# Altium PCB PCB1.PcbDoc (part 3 of 8)
Units mil, origin at the board's own origin, x right, y up, seen from the top; angles counter-clockwise.
Board outline 6000 x 4000 mil, 2 copper layers (Top Layer, Bottom Layer); 1253 components, 565 nets, 6549 pads, 0 vias.
Unrouted connection lines stored in the file: 1925.
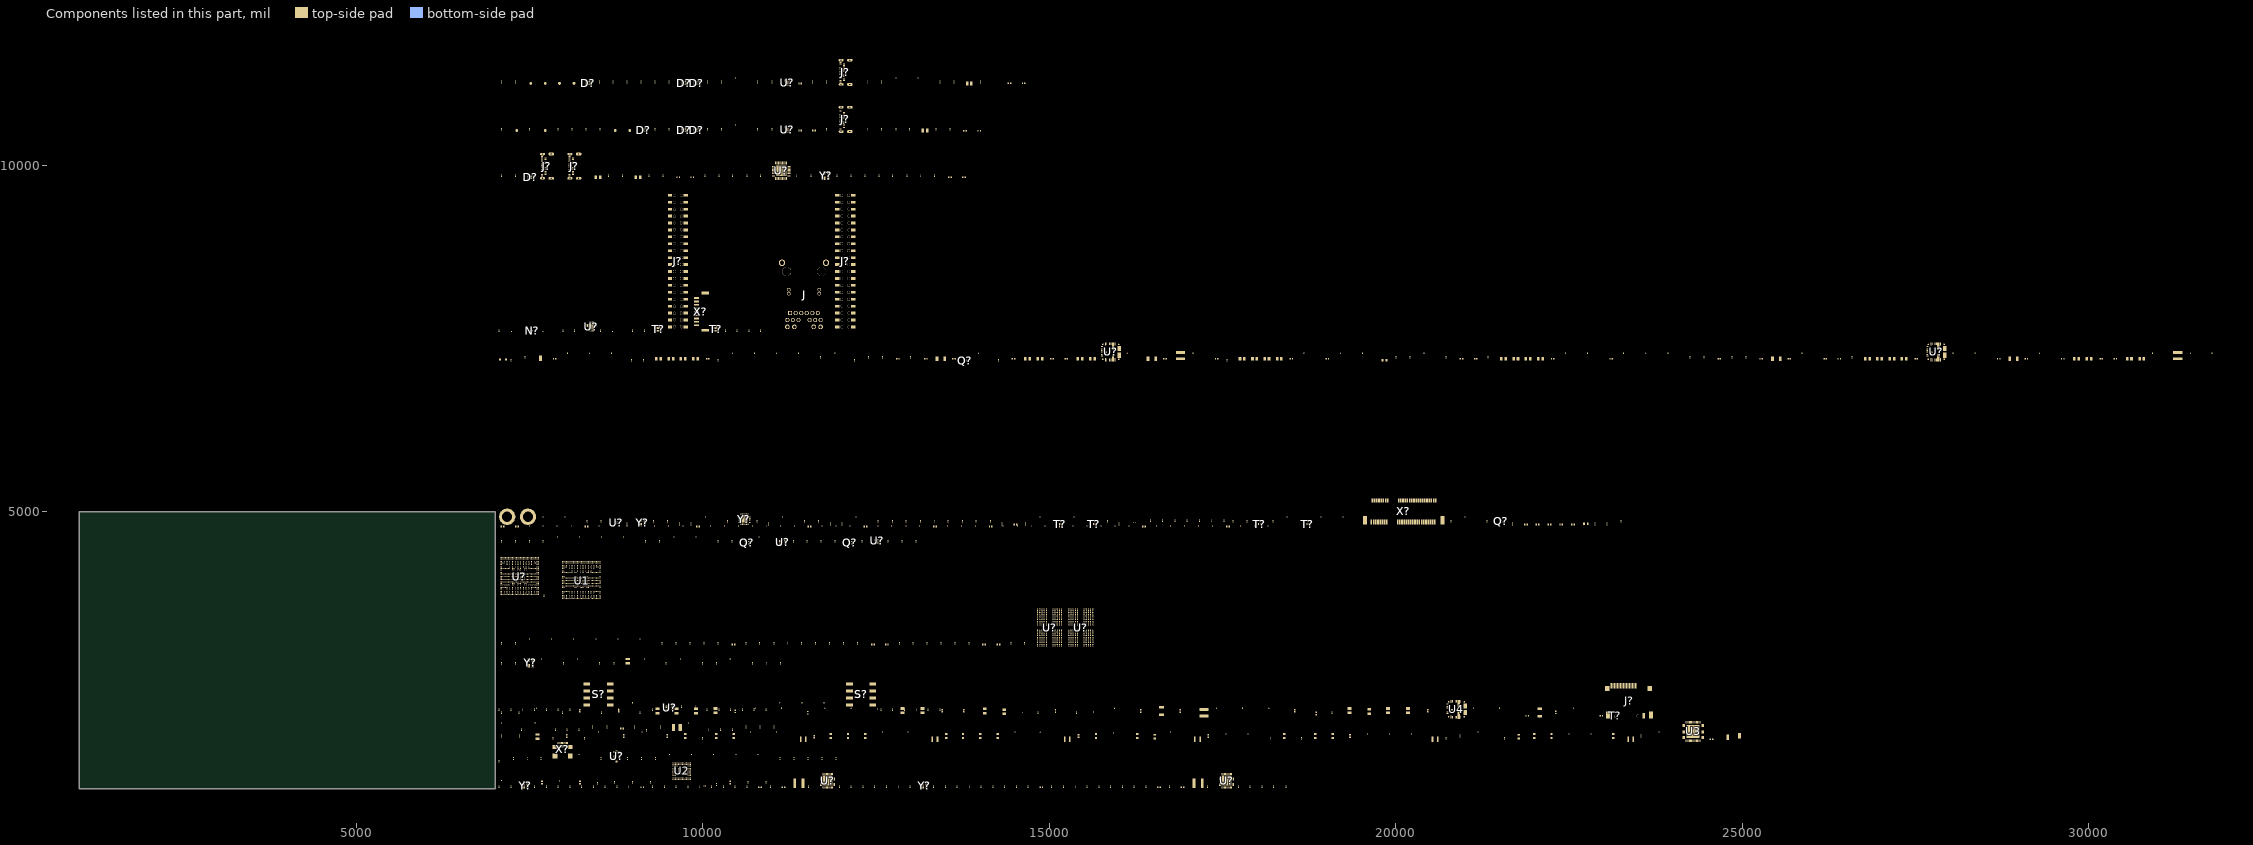
[diagram p3: the components of this part, seen from the top]

## Footprints (in the part's own frame and the unit in brackets; to place one, negate y for a bottom-side part, rotate by r counter-clockwise, add the part's x,y. Pads: shape width x height; smd on the part's side, far side on the other; paste and mask are expansions set on the pad)
3-PICOSTAR_TI [mm] "1.0 × 0.6 × 0.36 mm ,3-XFDFN, 3-PICOSTAR"
  rrect25% 0.35x0.25 smd paste-2539.97 mask-2539.97: 1(-0.35,0.225) 2(-0.35,-0.225)
  rrect25% 0.35x0.6 smd paste-2539.97 mask-2539.97: 3(0.35,0)
  silkscreen extent -0.53,-0.35 0.53,0.35, body extent -0.52,-0.32 0.52,0.32, height 0.34
693071020811 [mm]
  rect 0.7x1.9 smd: 1(2.25,11.05) 2(1.15,11.05) 3(0.05,11.05) 4(-1.05,11.05) 5(-2.15,11.05) 6(-3.25,11.05) 7(-4.35,11.05) 8(-5.45,11.05) 9(-6.55,11.05)
  rect 1.7x1.8 smd: 10(-8.1,10) 11(7.4,10)
  rect 1.4x2.6 smd: 12(-7.85,0.4) 13(7.85,0.4)
  round 0.9 hole 0.9 unplated: ""(-4.95,0)
  round 1 hole 1 unplated: ""(3.05,0)
  Keep-Out Layer board cut-out: 2.648,-0.497 2.7,-0.5 3.4,-0.5 3.452,-0.497 3.504,-0.489 3.555,-0.476 3.603,-0.457 3.65,-0.433 3.694,-0.405 3.735,-0.372 3.772,-0.335 3.805,-0.294 3.833,-0.25 3.857,-0.203 3.876,-0.155 3.889,-0.104 3.897,-0.052 3.9,0 3.897,0.052 3.889,0.104 3.876,0.155 3.857,0.203 3.833,0.25 3.805,0.294 3.772,0.335 3.735,0.372 3.694,0.405 3.65,0.433 3.603,0.457 3.555,0.476 3.504,0.489 3.452,0.497 3.4,0.5 2.7,0.5 2.648,0.497 2.596,0.489 2.545,0.476 2.497,0.457 2.45,0.433 2.406,0.405 2.365,0.372 2.328,0.335 2.295,0.294 2.267,0.25 2.243,0.203 2.224,0.155 2.211,0.104 2.203,0.052 2.2,0 2.203,-0.052 2.211,-0.104 2.224,-0.155 2.243,-0.203 2.267,-0.25 2.295,-0.294 2.328,-0.335 2.365,-0.372 2.406,-0.405 2.45,-0.433 2.497,-0.457 2.545,-0.476 2.596,-0.489
  silkscreen extent -7.45,-3.97 7.45,12
BEL_0826-1X1T-M1-F [mil]
  rect 60x60 hole 40: 1(-200,-600)
  round 60 hole 40: 2(-120,-600) 3(-40,-600) 4(40,-600) 5(120,-600) 6(200,-600) 7(-240,-700) 8(-160,-700) 9(-80,-700) 10(80,-700) 11(160,-700) 12(240,-700)
  round 52 hole 35: 13(-220,-320) 14(220,-320) 15(-220,-262) 16(220,-262)
  round 67.5 hole 45: 17(-240,-800) 18(-140,-800) 19(140,-800) 20(240,-800)
  round 93 hole 62: S1(-317.5,125) S2(317.5,125)
  round 128 hole 128 unplated: ""(-250,0) ""(250,0)
  Keep-Out Layer region: 351,158 236,158 236,310 -236,310 -236,158 -351,158 -351,430 351,430
  Keep-Out Layer region: 351,158 236,158 236,310 -236,310 -236,158 -351,158 -351,430 351,430
  Keep-Out Layer region: -236,-790 -351,-790 -351,-535 -236,-535
  Keep-Out Layer region: 351,-790 236,-790 236,-535 351,-535
  Keep-Out Layer region: -236,-790 -351,-790 -351,-535 -236,-535
  Keep-Out Layer region: 351,-790 236,-790 236,-535 351,-535
  silkscreen extent -346,-860 321,430
BGA200C65P12X22_1000X1450X114 [mm] "BGA200"
  round 0.4 smd paste+0 mask+0.05: A1(-4.4,6.825) A2(-3.6,6.825) A3(-2.8,6.825) A4(-2,6.825) A5(-1.2,6.825) A8(1.2,6.825) A9(2,6.825) A10(2.8,6.825) A11(3.6,6.825) A12(4.4,6.825) AA1(-4.4,-6.175) AA2(-3.6,-6.175) AA3(-2.8,-6.175) AA4(-2,-6.175) AA5(-1.2,-6.175) AA8(1.2,-6.175) AA9(2,-6.175) AA10(2.8,-6.175) AA11(3.6,-6.175) AA12(4.4,-6.175) AB1(-4.4,-6.825) AB2(-3.6,-6.825) AB3(-2.8,-6.825) AB4(-2,-6.825) AB5(-1.2,-6.825) AB8(1.2,-6.825) AB9(2,-6.825) AB10(2.8,-6.825) AB11(3.6,-6.825) AB12(4.4,-6.825) B1(-4.4,6.175) B2(-3.6,6.175) B3(-2.8,6.175) B4(-2,6.175) B5(-1.2,6.175) B8(1.2,6.175) B9(2,6.175) B10(2.8,6.175) B11(3.6,6.175) B12(4.4,6.175) C1(-4.4,5.525) C2(-3.6,5.525) C3(-2.8,5.525) C4(-2,5.525) C5(-1.2,5.525) C8(1.2,5.525) C9(2,5.525) C10(2.8,5.525) C11(3.6,5.525) C12(4.4,5.525) D1(-4.4,4.875) D2(-3.6,4.875) D3(-2.8,4.875) D4(-2,4.875) D5(-1.2,4.875) D8(1.2,4.875) D9(2,4.875) D10(2.8,4.875) D11(3.6,4.875) D12(4.4,4.875) E1(-4.4,4.225) E2(-3.6,4.225) E3(-2.8,4.225) E4(-2,4.225) E5(-1.2,4.225) E8(1.2,4.225) E9(2,4.225) E10(2.8,4.225) E11(3.6,4.225) E12(4.4,4.225) F1(-4.4,3.575) F2(-3.6,3.575) F3(-2.8,3.575) F4(-2,3.575) F5(-1.2,3.575) F8(1.2,3.575) F9(2,3.575) F10(2.8,3.575) F11(3.6,3.575) F12(4.4,3.575) G1(-4.4,2.925) G2(-3.6,2.925) G3(-2.8,2.925) G4(-2,2.925) G5(-1.2,2.925) G8(1.2,2.925) G9(2,2.925) G10(2.8,2.925) G11(3.6,2.925) G12(4.4,2.925) H1(-4.4,2.275) H2(-3.6,2.275) H3(-2.8,2.275) H4(-2,2.275) H5(-1.2,2.275) H8(1.2,2.275) H9(2,2.275) H10(2.8,2.275) H11(3.6,2.275) H12(4.4,2.275) J1(-4.4,1.625) J2(-3.6,1.625) J3(-2.8,1.625) J4(-2,1.625) J5(-1.2,1.625) J8(1.2,1.625) J9(2,1.625) J10(2.8,1.625) J11(3.6,1.625) J12(4.4,1.625) K1(-4.4,0.975) K2(-3.6,0.975) K3(-2.8,0.975) K4(-2,0.975) K5(-1.2,0.975) K8(1.2,0.975) K9(2,0.975) K10(2.8,0.975) K11(3.6,0.975) K12(4.4,0.975) N1(-4.4,-0.975) N2(-3.6,-0.975) N3(-2.8,-0.975) N4(-2,-0.975) N5(-1.2,-0.975) N8(1.2,-0.975) N9(2,-0.975) N10(2.8,-0.975) N11(3.6,-0.975) N12(4.4,-0.975) P1(-4.4,-1.625) P2(-3.6,-1.625) P3(-2.8,-1.625) P4(-2,-1.625) P5(-1.2,-1.625) P8(1.2,-1.625) P9(2,-1.625) P10(2.8,-1.625) P11(3.6,-1.625) P12(4.4,-1.625) R1(-4.4,-2.275) R2(-3.6,-2.275) R3(-2.8,-2.275) R4(-2,-2.275) R5(-1.2,-2.275) R8(1.2,-2.275) R9(2,-2.275) R10(2.8,-2.275) R11(3.6,-2.275) R12(4.4,-2.275) T1(-4.4,-2.925) T2(-3.6,-2.925) T3(-2.8,-2.925) T4(-2,-2.925) T5(-1.2,-2.925) T8(1.2,-2.925) T9(2,-2.925) T10(2.8,-2.925) T11(3.6,-2.925) T12(4.4,-2.925) U1(-4.4,-3.575) U2(-3.6,-3.575) U3(-2.8,-3.575) U4(-2,-3.575) U5(-1.2,-3.575) U8(1.2,-3.575) U9(2,-3.575) U10(2.8,-3.575) U11(3.6,-3.575) U12(4.4,-3.575) V1(-4.4,-4.225) V2(-3.6,-4.225) V3(-2.8,-4.225) V4(-2,-4.225) V5(-1.2,-4.225) V8(1.2,-4.225) V9(2,-4.225) V10(2.8,-4.225) V11(3.6,-4.225) V12(4.4,-4.225) W1(-4.4,-4.875) W2(-3.6,-4.875) W3(-2.8,-4.875) W4(-2,-4.875) W5(-1.2,-4.875) W8(1.2,-4.875) W9(2,-4.875) W10(2.8,-4.875) W11(3.6,-4.875) W12(4.4,-4.875) Y1(-4.4,-5.525) Y2(-3.6,-5.525) Y3(-2.8,-5.525) Y4(-2,-5.525) Y5(-1.2,-5.525) Y8(1.2,-5.525) Y9(2,-5.525) Y10(2.8,-5.525) Y11(3.6,-5.525) Y12(4.4,-5.525)
  silkscreen extent -5,-7.25 5,7.25, body extent -5,-7.25 5,7.25, height 1.14
BGA548C50P29X29_1500X1500X148 [mm] "BGA548"
  round 0.25 smd paste+0 mask+0.05: A1(-7,7) A2(-6.5,7) A3(-6,7) A4(-5.5,7) A5(-5,7) A6(-4.5,7) A7(-4,7) A8(-3.5,7) A9(-3,7) A10(-2.5,7) A11(-2,7) A12(-1.5,7) A13(-1,7) A14(-0.5,7) A15(0,7) A16(0.5,7) A17(1,7) A18(1.5,7) A19(2,7) A20(2.5,7) A21(3,7) A22(3.5,7) A23(4,7) A24(4.5,7) A25(5,7) A26(5.5,7) A27(6,7) A28(6.5,7) A29(7,7) AA1(-7,-3) AA2(-6.5,-3) AA3(-6,-3) AA4(-5.5,-3) AA5(-5,-3) AA6(-4.5,-3) AA7(-4,-3) AA8(-3.5,-3) AA10(-2.5,-3) AA11(-2,-3) AA14(-0.5,-3) AA16(0.5,-3) AA19(2,-3) AA20(2.5,-3) AA22(3.5,-3) AA23(4,-3) AA24(4.5,-3) AA25(5,-3) AA26(5.5,-3) AA27(6,-3) AA28(6.5,-3) AA29(7,-3) AB1(-7,-3.5) AB2(-6.5,-3.5) AB8(-3.5,-3.5) AB10(-2.5,-3.5) AB12(-1.5,-3.5) AB14(-0.5,-3.5) AB16(0.5,-3.5) AB18(1.5,-3.5) AB20(2.5,-3.5) AB22(3.5,-3.5) AB28(6.5,-3.5) AB29(7,-3.5) AC1(-7,-4) AC2(-6.5,-4) AC3(-6,-4) AC4(-5.5,-4) AC5(-5,-4) AC6(-4.5,-4) AC8(-3.5,-4) AC10(-2.5,-4) AC12(-1.5,-4) AC14(-0.5,-4) AC16(0.5,-4) AC18(1.5,-4) AC20(2.5,-4) AC22(3.5,-4) AC24(4.5,-4) AC25(5,-4) AC26(5.5,-4) AC27(6,-4) AC28(6.5,-4) AC29(7,-4) AD1(-7,-4.5) AD2(-6.5,-4.5) AD6(-4.5,-4.5) AD8(-3.5,-4.5) AD10(-2.5,-4.5) AD12(-1.5,-4.5) AD14(-0.5,-4.5) AD16(0.5,-4.5) AD18(1.5,-4.5) AD20(2.5,-4.5) AD22(3.5,-4.5) AD24(4.5,-4.5) AD28(6.5,-4.5) AD29(7,-4.5) AE1(-7,-5) AE2(-6.5,-5) AE3(-6,-5) AE4(-5.5,-5) AE6(-4.5,-5) AE8(-3.5,-5) AE10(-2.5,-5) AE12(-1.5,-5) AE14(-0.5,-5) AE16(0.5,-5) AE18(1.5,-5) AE20(2.5,-5) AE22(3.5,-5) AE24(4.5,-5) AE26(5.5,-5) AE27(6,-5) AE28(6.5,-5) AE29(7,-5) AF1(-7,-5.5) AF2(-6.5,-5.5) AF4(-5.5,-5.5) AF6(-4.5,-5.5) AF8(-3.5,-5.5) AF10(-2.5,-5.5) AF12(-1.5,-5.5) AF14(-0.5,-5.5) AF16(0.5,-5.5) AF18(1.5,-5.5) AF20(2.5,-5.5) AF22(3.5,-5.5) AF24(4.5,-5.5) AF26(5.5,-5.5) AF28(6.5,-5.5) AF29(7,-5.5) AG1(-7,-6) AG2(-6.5,-6) AG4(-5.5,-6) AG6(-4.5,-6) AG8(-3.5,-6) AG10(-2.5,-6) AG12(-1.5,-6) AG14(-0.5,-6) AG16(0.5,-6) AG18(1.5,-6) AG20(2.5,-6) AG22(3.5,-6) AG24(4.5,-6) AG26(5.5,-6) AG28(6.5,-6) AG29(7,-6) AH1(-7,-6.5) AH2(-6.5,-6.5) AH3(-6,-6.5) AH4(-5.5,-6.5) AH5(-5,-6.5) AH6(-4.5,-6.5) AH7(-4,-6.5) AH8(-3.5,-6.5) AH9(-3,-6.5) AH10(-2.5,-6.5) AH11(-2,-6.5) AH12(-1.5,-6.5) AH13(-1,-6.5) AH14(-0.5,-6.5) AH15(0,-6.5) AH16(0.5,-6.5) AH17(1,-6.5) AH18(1.5,-6.5) AH19(2,-6.5) AH20(2.5,-6.5) AH21(3,-6.5) AH22(3.5,-6.5) AH23(4,-6.5) AH24(4.5,-6.5) AH25(5,-6.5) AH26(5.5,-6.5) AH27(6,-6.5) AH28(6.5,-6.5) AH29(7,-6.5) AJ1(-7,-7) AJ2(-6.5,-7) AJ3(-6,-7) AJ4(-5.5,-7) AJ5(-5,-7) AJ6(-4.5,-7) AJ7(-4,-7) AJ8(-3.5,-7) AJ9(-3,-7) AJ10(-2.5,-7) AJ11(-2,-7) AJ12(-1.5,-7) AJ13(-1,-7) AJ14(-0.5,-7) AJ15(0,-7) AJ16(0.5,-7) AJ17(1,-7) AJ18(1.5,-7) AJ19(2,-7) AJ20(2.5,-7) AJ21(3,-7) AJ22(3.5,-7) AJ23(4,-7) AJ24(4.5,-7) AJ25(5,-7) AJ26(5.5,-7) AJ27(6,-7) AJ28(6.5,-7) AJ29(7,-7) B1(-7,6.5) B2(-6.5,6.5) B3(-6,6.5) B4(-5.5,6.5) B5(-5,6.5) B6(-4.5,6.5) B7(-4,6.5) B8(-3.5,6.5) B9(-3,6.5) B10(-2.5,6.5) B11(-2,6.5) B12(-1.5,6.5) B13(-1,6.5) B14(-0.5,6.5) B15(0,6.5) B16(0.5,6.5) B17(1,6.5) B18(1.5,6.5) B19(2,6.5) B20(2.5,6.5) B21(3,6.5) B22(3.5,6.5) B23(4,6.5) B24(4.5,6.5) B25(5,6.5) B26(5.5,6.5) B27(6,6.5) B28(6.5,6.5) B29(7,6.5) C1(-7,6) C2(-6.5,6) C4(-5.5,6) C6(-4.5,6) C8(-3.5,6) C10(-2.5,6) C12(-1.5,6) C14(-0.5,6) C16(0.5,6) C18(1.5,6) C20(2.5,6) C22(3.5,6) C24(4.5,6) C26(5.5,6) C28(6.5,6) C29(7,6) D1(-7,5.5) D2(-6.5,5.5) D4(-5.5,5.5) D6(-4.5,5.5) D8(-3.5,5.5) D10(-2.5,5.5) D12(-1.5,5.5) D14(-0.5,5.5) D16(0.5,5.5) D18(1.5,5.5) D20(2.5,5.5) D22(3.5,5.5) D24(4.5,5.5) D26(5.5,5.5) D28(6.5,5.5) D29(7,5.5) E1(-7,5) E2(-6.5,5) E3(-6,5) E4(-5.5,5) E6(-4.5,5) E8(-3.5,5) E10(-2.5,5) E12(-1.5,5) E14(-0.5,5) E16(0.5,5) E18(1.5,5) E20(2.5,5) E22(3.5,5) E24(4.5,5) E26(5.5,5) E27(6,5) E28(6.5,5) E29(7,5) F1(-7,4.5) F2(-6.5,4.5) F6(-4.5,4.5) F8(-3.5,4.5) F10(-2.5,4.5) F12(-1.5,4.5) F14(-0.5,4.5) F16(0.5,4.5) F18(1.5,4.5) F20(2.5,4.5) F22(3.5,4.5) F24(4.5,4.5) F28(6.5,4.5) F29(7,4.5) G1(-7,4) G2(-6.5,4) G3(-6,4) G4(-5.5,4) G5(-5,4) G6(-4.5,4) G8(-3.5,4) G10(-2.5,4) G12(-1.5,4) G14(-0.5,4) G16(0.5,4) G18(1.5,4) G20(2.5,4) G22(3.5,4) G24(4.5,4) G25(5,4) G26(5.5,4) G27(6,4) G28(6.5,4) G29(7,4) H1(-7,3.5) H2(-6.5,3.5) H8(-3.5,3.5) H10(-2.5,3.5) H12(-1.5,3.5) H14(-0.5,3.5) H16(0.5,3.5) H18(1.5,3.5) H20(2.5,3.5) H22(3.5,3.5) H28(6.5,3.5) H29(7,3.5) J1(-7,3) J2(-6.5,3) J3(-6,3) J4(-5.5,3) J5(-5,3) J6(-4.5,3) J7(-4,3) J8(-3.5,3) J10(-2.5,3) J11(-2,3) J14(-0.5,3) J16(0.5,3) J19(2,3) J20(2.5,3) J22(3.5,3) J23(4,3) J24(4.5,3) J25(5,3) J26(5.5,3) J27(6,3) J28(6.5,3) J29(7,3) K1(-7,2.5) K2(-6.5,2.5) K10(-2.5,2.5) K11(-2,2.5) K14(-0.5,2.5) K15(0,2.5) K16(0.5,2.5) K19(2,2.5) K20(2.5,2.5) K28(6.5,2.5) K29(7,2.5) L1(-7,2) L2(-6.5,2) L3(-6,2) L4(-5.5,2) L5(-5,2) L6(-4.5,2) L7(-4,2) L8(-3.5,2) L9(-3,2) L10(-2.5,2) L11(-2,2) L12(-1.5,2) L13(-1,2) L14(-0.5,2) L16(0.5,2) L17(1,2) L18(1.5,2) L19(2,2) L20(2.5,2) L21(3,2) L22(3.5,2) L23(4,2) L24(4.5,2) L25(5,2) L26(5.5,2) L27(6,2) L28(6.5,2) L29(7,2) M1(-7,1.5) M2(-6.5,1.5) M11(-2,1.5) M14(-0.5,1.5) M16(0.5,1.5) M19(2,1.5) M28(6.5,1.5) M29(7,1.5) N1(-7,1) N2(-6.5,1) N3(-6,1) N4(-5.5,1) N5(-5,1) N6(-4.5,1) N7(-4,1) N8(-3.5,1) N9(-3,1) N10(-2.5,1) N11(-2,1) N12(-1.5,1) N13(-1,1) N14(-0.5,1) N15(0,1) N16(0.5,1) N17(1,1) N18(1.5,1) N19(2,1) N20(2.5,1) N21(3,1) N22(3.5,1) N23(4,1) N24(4.5,1) N25(5,1) N26(5.5,1) N27(6,1) N28(6.5,1) N29(7,1) P1(-7,0.5) P2(-6.5,0.5) P11(-2,0.5) P14(-0.5,0.5) P16(0.5,0.5) P19(2,0.5) P28(6.5,0.5) P29(7,0.5) R1(-7,0) R2(-6.5,0) R3(-6,0) R4(-5.5,0) R5(-5,0) R6(-4.5,0) R7(-4,0) R8(-3.5,0) R9(-3,0) R10(-2.5,0) R11(-2,0) R12(-1.5,0) R13(-1,0) R14(-0.5,0) R16(0.5,0) R17(1,0) R18(1.5,0) R19(2,0) R20(2.5,0) R21(3,0) R22(3.5,0) R23(4,0) R24(4.5,0) R25(5,0) R26(5.5,0) R27(6,0) R28(6.5,0) R29(7,0) T1(-7,-0.5) T2(-6.5,-0.5) T11(-2,-0.5) T14(-0.5,-0.5) T16(0.5,-0.5) T19(2,-0.5) T28(6.5,-0.5) T29(7,-0.5) U1(-7,-1) U2(-6.5,-1) U3(-6,-1) U4(-5.5,-1) U5(-5,-1) U6(-4.5,-1) U7(-4,-1) U8(-3.5,-1) U9(-3,-1) U10(-2.5,-1) U11(-2,-1) U12(-1.5,-1) U13(-1,-1) U14(-0.5,-1) U15(0,-1) U16(0.5,-1) U17(1,-1) U18(1.5,-1) U19(2,-1) U20(2.5,-1) U21(3,-1) U22(3.5,-1) U23(4,-1) U24(4.5,-1) U25(5,-1) U26(5.5,-1) U27(6,-1) U28(6.5,-1) U29(7,-1) V1(-7,-1.5) V2(-6.5,-1.5) V11(-2,-1.5) V14(-0.5,-1.5) V16(0.5,-1.5) V19(2,-1.5) V28(6.5,-1.5) V29(7,-1.5) W1(-7,-2) W2(-6.5,-2) W3(-6,-2) W4(-5.5,-2) W5(-5,-2) W6(-4.5,-2) W7(-4,-2) W8(-3.5,-2) W9(-3,-2) W10(-2.5,-2) W11(-2,-2) W12(-1.5,-2) W13(-1,-2) W14(-0.5,-2) W16(0.5,-2) W17(1,-2) W18(1.5,-2) W19(2,-2) W20(2.5,-2) W21(3,-2) W22(3.5,-2) W23(4,-2) W24(4.5,-2) W25(5,-2) W26(5.5,-2) W27(6,-2) W28(6.5,-2) W29(7,-2) Y1(-7,-2.5) Y2(-6.5,-2.5) Y10(-2.5,-2.5) Y11(-2,-2.5) Y14(-0.5,-2.5) Y15(0,-2.5) Y16(0.5,-2.5) Y19(2,-2.5) Y20(2.5,-2.5) Y28(6.5,-2.5) Y29(7,-2.5)
  silkscreen extent -7.5,-7.5 7.5,7.5, body extent -7.5,-7.5 7.5,7.5, height 1.48
CAP_0201_UN1Q [mm] "Chip Capacitor 0201"
  rect 0.34x0.34 smd mask+0.05: 1(-0.29,0) 2(0.29,0)
  Top Layer keep-out region: -0.073,-0.165 0.077,-0.165 0.077,0.165 -0.073,0.165
  silkscreen extent -0.48,-0.18 0.48,0.18, body extent -0.3,-0.15 0.3,0.15, height 0.33
CAP_0402_H09W07_UN1Q [mm] "Chip Capacitor 0402 BIG"
  rect 0.52x0.7 smd paste+0 mask+0.05: 1(-0.45,0) 2(0.45,0)
  Top Layer keep-out region: -0.075,-0.197 0.075,-0.197 0.075,0.203 -0.075,0.203
  silkscreen extent -0.67,-0.35 0.67,0.35, body extent -0.55,-0.35 0.55,0.35, height 0.9
CAP_0402_UN1Q [mm] "Chip Capacitor 0402"
  rect 0.52x0.52 smd paste+0 mask+0.05: 1(-0.4,0) 2(0.4,0)
  Top Layer keep-out region: -0.05,-0.2 0.05,-0.2 0.05,0.2 -0.05,0.2
  silkscreen extent -0.67,-0.28 0.67,0.28, body extent -0.5,-0.25 0.5,0.25, height 0.6
CAP_0603_UN1Q [mm] "Chip Capacitor 0603"
  rect 0.7x0.9 smd paste+0 mask+0.05: 1(-0.7,0) 2(0.7,0)
  silkscreen extent -0.87,-0.5 0.87,0.5, body extent -0.8,-0.45 0.8,0.45, height 1
CAP_0805_UN1Q [mm] "Chip Capacitor 0805"
  rect 0.95x1.4 smd paste+0 mask+0.05: 1(-0.8,0) 2(0.8,0)
  silkscreen extent -1.07,-0.75 1.07,0.75, body extent -1,-0.7 1,0.7, height 1.45
CAP_1206_UN1Q [mm] "Chip Capacitor 1206"
  rect 0.95x1.8 smd paste+0 mask+0.05: 1(-1.4,0) 2(1.4,0)
  silkscreen extent -1.73,-0.95 1.73,0.95, body extent -1.6,-0.9 1.6,0.9, height 1.9
CAP_1210_UN1Q_1 [mm] "1210 Chip Capacitor, Body 3.2x2.5mm, Height 2.5mm"
  rect 1.2x2.6 smd paste+0 mask+0.05: 1(-1.275,0) 2(1.275,0)
  silkscreen extent -1.95,-1.4 1.95,1.4, body extent -1.6,-1.1 1.6,1.1, height 2.5
CM8V32768TA020125_MC [mm] "2.0 x 1.2 x 0.60 mm"
  rect 0.8x1.5 smd paste+0 mask+0.06: 1(-0.75,0) 2(0.75,0)
  silkscreen extent -1.05,-0.65 1.02,0.65, body extent -1,-0.6 1,0.6, height 0.63
DHX2QFN18_NXP [mm] "DHX2QFN18 NXP"
  rect 0.3x0.2 smd paste+0 mask+0.05: 1(-0.85,0.6) 2(-0.85,0.2) 3(-0.85,-0.2) 4(-0.85,-0.6) 10(0.85,-0.6) 11(0.85,-0.2) 12(0.85,0.2) 13(0.85,0.6)
  rect 0.2x0.3 smd paste+0 mask+0.05: 5(-0.8,-1.05) 6(-0.4,-1.05) 7(0,-1.05) 8(0.4,-1.05) 9(0.8,-1.05) 14(0.8,1.05) 15(0.4,1.05) 16(0,1.05) 17(-0.4,1.05) 18(-0.8,1.05)
  rect 1x1.4 smd paste+0 mask+0.05: 19(0,0)
  silkscreen extent -1,-1.2 1,1.2, body extent -1,-1.2 1,1.2, height 0.35
DLM0NSxxxxHY2_Murata [mm] "SMD 0.85x0.65x0.50mm"
  rect 0.3x0.3 smd paste+0 mask+0.05: 1(-0.3,0.25) 2(0.3,0.25) 3(0.3,-0.25) 4(-0.3,-0.25)
  silkscreen extent -0.33,-0.43 0.33,0.43, body extent -0.32,-0.42 0.33,0.43, height 0.5
ECMF4-2450A60N10 [mm]
  rect 0.2x0.7 smd paste+0 mask+0.05: 1(-0.8,-0.525) 2(-0.4,-0.525) 3(0,-0.525) 4(0.4,-0.525) 5(0.8,-0.525) 6(0.8,0.525) 7(0.4,0.525) 8(0,0.525) 9(-0.4,0.525) 10(-0.8,0.525)
  silkscreen extent -1.1,-0.67 1.1,0.67, body extent -1.1,-0.68 1.1,0.68, height 0.43
FERR_BLM15KD [mm] "Chip Resistor, Body 1.0x0.5mm, IPC High Density"
  rect 0.45x0.55 smd mask+0.05: 1(-0.45,0) 2(0.45,0)
  Top Layer keep-out region: -0.15,-0.276 0.15,-0.276 0.15,0.274 -0.15,0.274
  silkscreen extent -0.67,-0.3 0.67,0.3, body extent -0.65,-0.27 0.65,0.28, height 0.55
GA153C50P14X14_1150X1300X120 [mm]
  round 0.29 smd paste+0 mask+0.05: A1(-3.25,3.25) A2(-2.75,3.25) A3(-2.25,3.25) A4(-1.75,3.25) A5(-1.25,3.25) A6(-0.75,3.25) A7(-0.25,3.25) A8(0.25,3.25) A9(0.75,3.25) A10(1.25,3.25) A11(1.75,3.25) A12(2.25,3.25) A13(2.75,3.25) A14(3.25,3.25) B1(-3.25,2.75) B2(-2.75,2.75) B3(-2.25,2.75) B4(-1.75,2.75) B5(-1.25,2.75) B6(-0.75,2.75) B7(-0.25,2.75) B8(0.25,2.75) B9(0.75,2.75) B10(1.25,2.75) B11(1.75,2.75) B12(2.25,2.75) B13(2.75,2.75) B14(3.25,2.75) C1(-3.25,2.25) C2(-2.75,2.25) C3(-2.25,2.25) C4(-1.75,2.25) C5(-1.25,2.25) C6(-0.75,2.25) C7(-0.25,2.25) C8(0.25,2.25) C9(0.75,2.25) C10(1.25,2.25) C11(1.75,2.25) C12(2.25,2.25) C13(2.75,2.25) C14(3.25,2.25) D1(-3.25,1.75) D2(-2.75,1.75) D3(-2.25,1.75) D4(-1.75,1.75) D12(2.25,1.75) D13(2.75,1.75) D14(3.25,1.75) E1(-3.25,1.25) E2(-2.75,1.25) E3(-2.25,1.25) E5(-1.25,1.25) E6(-0.75,1.25) E7(-0.25,1.25) E8(0.25,1.25) E9(0.75,1.25) E10(1.25,1.25) E12(2.25,1.25) E13(2.75,1.25) E14(3.25,1.25) F1(-3.25,0.75) F2(-2.75,0.75) F3(-2.25,0.75) F5(-1.25,0.75) F10(1.25,0.75) F12(2.25,0.75) F13(2.75,0.75) F14(3.25,0.75) G1(-3.25,0.25) G2(-2.75,0.25) G3(-2.25,0.25) G5(-1.25,0.25) G10(1.25,0.25) G12(2.25,0.25) G13(2.75,0.25) G14(3.25,0.25) H1(-3.25,-0.25) H2(-2.75,-0.25) H3(-2.25,-0.25) H5(-1.25,-0.25) H10(1.25,-0.25) H12(2.25,-0.25) H13(2.75,-0.25) H14(3.25,-0.25) J1(-3.25,-0.75) J2(-2.75,-0.75) J3(-2.25,-0.75) J5(-1.25,-0.75) J10(1.25,-0.75) J12(2.25,-0.75) J13(2.75,-0.75) J14(3.25,-0.75) K1(-3.25,-1.25) K2(-2.75,-1.25) K3(-2.25,-1.25) K5(-1.25,-1.25) K6(-0.75,-1.25) K7(-0.25,-1.25) K8(0.25,-1.25) K9(0.75,-1.25) K10(1.25,-1.25) K12(2.25,-1.25) K13(2.75,-1.25) K14(3.25,-1.25) L1(-3.25,-1.75) L2(-2.75,-1.75) L3(-2.25,-1.75) L12(2.25,-1.75) L13(2.75,-1.75) L14(3.25,-1.75) M1(-3.25,-2.25) M2(-2.75,-2.25) M3(-2.25,-2.25) M4(-1.75,-2.25) M5(-1.25,-2.25) M6(-0.75,-2.25) M7(-0.25,-2.25) M8(0.25,-2.25) M9(0.75,-2.25) M10(1.25,-2.25) M11(1.75,-2.25) M12(2.25,-2.25) M13(2.75,-2.25) M14(3.25,-2.25) N1(-3.25,-2.75) N2(-2.75,-2.75) N3(-2.25,-2.75) N4(-1.75,-2.75) N5(-1.25,-2.75) N6(-0.75,-2.75) N7(-0.25,-2.75) N8(0.25,-2.75) N9(0.75,-2.75) N10(1.25,-2.75) N11(1.75,-2.75) N12(2.25,-2.75) N13(2.75,-2.75) N14(3.25,-2.75) P1(-3.25,-3.25) P2(-2.75,-3.25) P3(-2.25,-3.25) P4(-1.75,-3.25) P5(-1.25,-3.25) P6(-0.75,-3.25) P7(-0.25,-3.25) P8(0.25,-3.25) P9(0.75,-3.25) P10(1.25,-3.25) P11(1.75,-3.25) P12(2.25,-3.25) P13(2.75,-3.25) P14(3.25,-3.25)
  silkscreen extent -5.75,-6.5 5.75,6.5, body extent -5.75,-6.5 5.75,6.5, height 1.21
HX2QFN20_NXP [mm] "HX2QFN20 NXP"
  rrect25% 0.7x0.2 smd paste+0 mask+0.05: 1(-1.5,0.8) 2(-1.5,0.4) 3(-1.5,0) 4(-1.5,-0.4) 5(-1.5,-0.8) 11(1.5,-0.8) 12(1.5,-0.4) 13(1.5,0) 14(1.5,0.4) 15(1.5,0.8)
  rrect25% 0.2x0.7 smd paste+0 mask+0.05: 6(-0.8,-1.5) 7(-0.4,-1.5) 8(0,-1.5) 9(0.4,-1.5) 10(0.8,-1.5) 16(0.8,1.5) 17(0.4,1.5) 18(0,1.5) 19(-0.4,1.5) 20(-0.8,1.5)
  rect 1.9x1.9 smd paste-0.2 mask+0.05: 21(0,0)
  silkscreen extent -1.55,-1.55 1.55,1.55, body extent -1.5,-1.5 1.5,1.5, height 0.34
IND_0201_UN1Q [mm] "Chip Resistor, 0.6x0.3mm, IPC High Density"
  rect 0.34x0.34 smd mask+0.05: 1(-0.29,0) 2(0.29,0)
  Top Layer keep-out region: -0.075,-0.169 0.075,-0.169 0.075,0.161 -0.075,0.161
  silkscreen extent -0.48,-0.18 0.48,0.18, body extent -0.3,-0.15 0.3,0.15, height 0.3
IND_0603_UN1Q [mm] "Chip Inductor, 1.6x0.8mm"
  rect 0.7x0.9 smd mask+0.07: 1(-0.7,0) 2(0.7,0)
  silkscreen extent -1.05,-0.48 1.05,0.48, body extent -1.05,-0.48 1.05,0.48, height 0.8
IND_74479335329222_353220 [mm] "3.5 x 3.2 x 2.0mm"
  rect 1x3.5 smd paste+0 mask+0.05: 1(-1.5,0) 2(1.5,0)
  silkscreen extent -1.75,-1.6 1.75,1.6, body extent -1.75,-1.6 1.75,1.6, height 2.01
IND_VLS2520 [mm]
  rect 0.6x2 smd paste+0 mask+0.05: 1(-0.95,0) 2(0.95,0)
  silkscreen extent -1.25,-1 1.25,1, body extent -1.25,-1 1.25,1, height 1.2
IND_XGL4030 [mm]
  rect 0.98x3.4 smd paste+0 mask+0.05: 1(-1.185,0) 2(1.185,0)
  silkscreen extent -2.15,-2.15 2.15,2.15, body extent -2.15,-2.15 2.15,2.15, height 3
MAX14591_SON50P200X200X80-8N [mm] "MAX14591 Logic-level translator, 0.8mm height"
  rect 1x0.3 smd paste+0 mask+0.05: 1(-0.875,0.75)
  rect 0.85x0.3 smd paste+0 mask+0.05: 2(-0.95,0.25) 3(-0.95,-0.25) 4(-0.95,-0.75) 5(0.95,-0.75) 6(0.95,-0.25) 7(0.95,0.25) 8(0.95,0.75)
  silkscreen extent -1.05,-1.05 1.05,1.05, body extent -1.05,-1 1.05,1, height 0.8
mPCIe_TE_1775862-2 [mm] "mPCie 5.2H Type I G/F"
  rect 0.6x2 smd paste+0 mask+0.05: 1(-11.8,-4.1) 3(-11,-4.1) 5(-10.2,-4.1) 7(-9.4,-4.1) 9(-8.6,-4.1) 11(-7.8,-4.1) 13(-7,-4.1) 15(-6.2,-4.1) 17(-2.2,-4.1) 19(-1.4,-4.1) 21(-0.6,-4.1) 23(0.2,-4.1) 25(1,-4.1) 27(1.8,-4.1) 29(2.6,-4.1) 31(3.4,-4.1) 33(4.2,-4.1) 35(5,-4.1) 37(5.8,-4.1) 39(6.6,-4.1) 41(7.4,-4.1) 43(8.2,-4.1) 45(9,-4.1) 47(9.8,-4.1) 49(10.6,-4.1) 51(11.4,-4.1)
  rect 0.6x1.4 smd paste+0 mask+0.05: 2(-11.4,3.8) 4(-10.6,3.8) 6(-9.8,3.8) 8(-9,3.8) 10(-8.2,3.8) 12(-7.4,3.8) 14(-6.6,3.8) 16(-5.8,3.8) 18(-1.8,3.8) 20(-1,3.8) 22(-0.2,3.8) 24(0.6,3.8) 26(1.4,3.8) 28(2.2,3.8) 30(3,3.8) 32(3.8,3.8) 34(4.6,3.8) 36(5.4,3.8) 38(6.2,3.8) 40(7,3.8) 42(7.8,3.8) 44(8.6,3.8) 46(9.4,3.8) 48(10.2,3.8) 50(11,3.8) 52(11.8,3.8)
  round 0 hole 1.65 unplated paste-2539.97 mask+0.1: 55(-12.5,0)
  round 0 hole 1.15 unplated paste-2539.97 mask+0.1: 56(12.5,0)
  rect 1.45x3.2 smd paste+0 mask+0.1: MP1(-14.225,-3.5) MP2(14.225,-3.5)
  silkscreen extent -14.95,-3.85 14.95,4.6, body extent -14.95,-4.58 14.95,4.5, height 5.21
PCMF1USB3S_EMI [mm]
  round 0.2 smd paste+0 mask+0.05: A1(-0.2,0.4) A2(0.2,0.4) B1(0,0) C1(-0.2,-0.4) C2(0.2,-0.4)
  silkscreen extent -0.45,-0.65 0.45,0.65, body extent -0.39,-0.59 0.39,0.59, height 0.58
PTP_0.4mm [mm] "ProductionTest Point, Circular, 0.4mm. Flying probe. Use 1mm pitch."
  round 0.4 smd paste-0.5 mask+0.05: 1(0,0)
  silkscreen extent -0.2,-0.2 0.2,0.2, body extent -0.2,-0.19 0.2,0.21, height 0.01
QFN40_5x5mm [mm] "MP6536"
  rect 0.7x0.2 smd paste+0 mask+0.05: 1(-2.45,1.8) 2(-2.45,1.4) 3(-2.45,1) 4(-2.45,0.6) 5(-2.45,0.2) 6(-2.45,-0.2) 7(-2.45,-0.6) 8(-2.45,-1) 9(-2.45,-1.4) 10(-2.45,-1.8) 21(2.45,-1.8) 22(2.45,-1.4) 23(2.45,-1) 24(2.45,-0.6) 25(2.45,-0.2) 26(2.45,0.2) 27(2.45,0.6) 28(2.45,1) 29(2.45,1.4) 30(2.45,1.8)
  rect 0.2x0.7 smd paste+0 mask+0.05: 11(-1.8,-2.45) 12(-1.4,-2.45) 13(-1,-2.45) 14(-0.6,-2.45) 15(-0.2,-2.45) 16(0.2,-2.45) 17(0.6,-2.45) 18(1,-2.45) 19(1.4,-2.45) 20(1.8,-2.45) 31(1.8,2.45) 32(1.4,2.45) 33(1,2.45) 34(0.6,2.45) 35(0.2,2.45) 36(-0.2,2.45) 37(-0.6,2.45) 38(-1,2.45) 39(-1.4,2.45) 40(-1.8,2.45)
  rect 3.7x3.7 smd paste-2 mask+0.05: 41(0,0)
  silkscreen extent -2.55,-2.55 2.55,2.55, body extent -2.55,-2.55 2.55,2.55, height 1
QFN57P40_700X700X100NXP [mm] "QFN56 + pad NXP"
  rect 0.9x0.2 smd paste+0 mask+0.05: 1(-3.45,2.6) 2(-3.45,2.2) 3(-3.45,1.8) 4(-3.45,1.4) 5(-3.45,1) 6(-3.45,0.6) 7(-3.45,0.2) 8(-3.45,-0.2) 9(-3.45,-0.6) 10(-3.45,-1) 11(-3.45,-1.4) 12(-3.45,-1.8) 13(-3.45,-2.2) 14(-3.45,-2.6) 29(3.45,-2.6) 30(3.45,-2.2) 31(3.45,-1.8) 32(3.45,-1.4) 33(3.45,-1) 34(3.45,-0.6) 35(3.45,-0.2) 36(3.45,0.2) 37(3.45,0.6) 38(3.45,1) 39(3.45,1.4) 40(3.45,1.8) 41(3.45,2.2) 42(3.45,2.6)
  rect 0.2x0.9 smd paste+0 mask+0.05: 15(-2.6,-3.45) 16(-2.2,-3.45) 17(-1.8,-3.45) 18(-1.4,-3.45) 19(-1,-3.45) 20(-0.6,-3.45) 21(-0.2,-3.45) 22(0.2,-3.45) 23(0.6,-3.45) 24(1,-3.45) 25(1.4,-3.45) 26(1.8,-3.45) 27(2.2,-3.45) 28(2.6,-3.45) 43(2.6,3.45) 44(2.2,3.45) 45(1.8,3.45) 46(1.4,3.45) 47(1,3.45) 48(0.6,3.45) 49(0.2,3.45) 50(-0.2,3.45) 51(-0.6,3.45) 52(-1,3.45) 53(-1.4,3.45) 54(-1.8,3.45) 55(-2.2,3.45) 56(-2.6,3.45)
  rect 4.8x4.8 smd paste-3 mask+0.05: 57(0,0)
  silkscreen extent -3.5,-3.5 3.5,3.5, body extent -3.5,-3.5 3.5,3.5, height 1
QFN-FCMOD-28_TI [mm] "QFN-FCMOD-28 package from Texas Instruments"
  round 0.565 smd paste-0.27 mask+0: 1(-2.961,2.711) 11(-2.961,-2.711) 18(2.861,-2.711) 21(2.861,2.711)
  rect 0.8x0.25 smd paste+0 mask+0: 2(-3.3,2) 3(-3.3,1.5) 9(-3.3,-1.5) 10(-3.3,-2)
  rect 0.7x0.25 smd paste+0 mask+0: 4(-3.35,1) 5(-3.35,0.5) 6(-3.35,0) 7(-3.35,-0.5) 8(-3.35,-1)
  rect 0.25x1.2 smd paste+0 mask+0: 12(-2,-2.85) 17(1.5,-2.85) 22(1.5,2.85) 27(-2,2.85)
  rect 0.25x1 smd paste+0 mask+0: 13(-1.5,-2.95) 14(-0.5,-2.95) 15(0,-2.95) 24(0,2.95) 25(-0.5,2.95) 26(-1.5,2.95)
  rect 0.85x2.8 smd paste-1.387 mask-1.384: 16(0.75,-2.1) 23(0.75,2.1)
  rect 1.275x1.85 smd paste-0.912 mask-0.914: 19(3.113,-1.25) 20(3.113,1.25)
  round 0.644 smd paste-0.309 mask+0: 28(-1.675,-0.15)
  Top Layer region: -2.575,2.375 -3.65,2.375 -3.7,2.425 -3.7,2.575 -3.65,2.625 -3.375,2.625 -3.275,2.725 -3.275,2.975 -3.225,3.025 -2.875,3.025 -2.775,3.125 -2.775,3.4 -2.725,3.45 -2.575,3.45 -2.525,3.4 -2.525,2.425
  Top Layer region: -2.575,-2.375 -3.65,-2.375 -3.7,-2.425 -3.7,-2.575 -3.65,-2.625 -3.375,-2.625 -3.275,-2.725 -3.275,-2.975 -3.225,-3.025 -2.875,-3.025 -2.775,-3.125 -2.775,-3.4 -2.725,-3.45 -2.575,-3.45 -2.525,-3.4 -2.525,-2.425
  Top Layer region: 2.575,-2.375 3.65,-2.375 3.7,-2.425 3.7,-2.575 3.65,-2.625 3.375,-2.625 3.275,-2.725 3.275,-2.975 3.225,-3.025 2.875,-3.025 2.775,-3.125 2.775,-3.4 2.725,-3.45 2.575,-3.45 2.525,-3.4 2.525,-2.425
  Top Layer region: 2.575,2.375 3.65,2.375 3.7,2.425 3.7,2.575 3.65,2.625 3.375,2.625 3.275,2.725 3.275,2.975 3.225,3.025 2.875,3.025 2.775,3.125 2.775,3.4 2.725,3.45 2.575,3.45 2.525,3.4 2.525,2.425
  Top Layer region: -2.05,-1.25 -2.05,1.25 -2,1.3 -1.5,1.3 -1.45,1.25 -1.45,0.35 -1.4,0.3 -0.35,0.3 -0.3,0.25 -0.3,-0.25 -0.35,-0.3 -1.4,-0.3 -1.45,-0.35 -1.45,-1.25 -1.5,-1.3 -2,-1.3
  silkscreen extent -3.55,-3.3 3.55,3.3, body extent -3.55,-3.3 3.55,3.3, height 1.95
RES_0201_UN1Q [mm] "Chip Resistor, 0.6x0.3mm"
  rect 0.34x0.34 smd mask+0.05: 1(-0.29,0) 2(0.29,0)
  Top Layer keep-out region: -0.075,-0.164 0.075,-0.164 0.075,0.166 -0.075,0.166
  silkscreen extent -0.48,-0.18 0.48,0.18, body extent -0.3,-0.15 0.3,0.15, height 0.26
SM09B-GHS-TB [mm] "JST GH Connector, 9 pin, Horizontal, Pitch 1.25 mm"
  rect 0.6x1.7 smd paste+0 mask+0.07: 1(-5,1.85) 2(-3.75,1.85) 3(-2.5,1.85) 4(-1.25,1.85) 5(0,1.85) 6(1.25,1.85) 7(2.5,1.85) 8(3.75,1.85) 9(5,1.85)
  rect 1x2.8 smd paste+0 mask+0.07: MP1(6.85,-1.4) MP2(-6.85,-1.4)
  silkscreen extent -7.25,-2.5 7.25,1.6, body extent -7.25,-2.47 7.25,2.48, height 4.25
SOD-323 [mm]
  rect 0.63x0.83 smd paste+0 mask+0.06: 1(-1.1,0)
  rect 0.63x0.83 smd mask+0.06: 2(1.1,0)
  silkscreen extent -1.35,-0.65 1.35,0.65, body extent -1.34,-0.65 1.34,0.65, height 0.94
SOT65P210X110-6N [mm]
  rrect25% 1.19x0.4 smd: 1(-0.96,0.65) 2(-0.96,0) 3(-0.96,-0.65) 4(0.96,-0.65) 5(0.96,0) 6(0.96,0.65)
  silkscreen extent -2.2,-1.17 0.63,1.17, body extent -1.05,-1 1.05,1, height 1.1
SOT883_DFN1006-3_NEXPERIA [mm] "DFN1006-3 1.0 x 0.6"
  rrect25% 0.4x0.25 smd paste-0.02 mask+0.05: 1(-0.35,0.225) 2(-0.35,-0.225)
  rrect25% 0.4x0.7 smd paste-0.04 mask+0.05: 3(0.35,0)
  silkscreen extent -0.48,-0.3 0.53,0.3, body extent -0.48,-0.3 0.52,0.3, height 0.5
SOT-563 [mm] "SOT-563, SOT-666, EMT6"
  rect 0.67x0.3 smd paste+0 mask+0.05: 1(-0.625,0.5) 2(-0.625,0) 3(-0.625,-0.5) 4(0.625,-0.5) 5(0.625,0) 6(0.625,0.5)
  silkscreen extent -0.8,-0.8 0.8,0.8, body extent -0.8,-0.8 0.8,0.8, height 0.55
Standoff_2_7mm_M25_WURTH [mm] "Standoff 2.7 mm M2.5  Hole 3.7 mm"
  round 6 / inner round 4 / far side round 4 hole 3.7 paste-2539.97 mask+0.1: 1(0,0)
  silkscreen extent -3.1,-3.1 3.1,3.1, body extent -2.55,-2.55 2.55,2.55, height 2.75
SULLINS_NPTC202KFMS-RC [mm]
  rect 1x1.56 smd: 1(-24.13,-2.905) 2(-24.13,2.905) 3(-21.59,-2.905) 4(-21.59,2.905) 5(-19.05,-2.905) 6(-19.05,2.905) 7(-16.51,-2.905) 8(-16.51,2.905) 9(-13.97,-2.905) 10(-13.97,2.905) 11(-11.43,-2.905) 12(-11.43,2.905) 13(-8.89,-2.905) 14(-8.89,2.905) 15(-6.35,-2.905) 16(-6.35,2.905) 17(-3.81,-2.905) 18(-3.81,2.905) 19(-1.27,-2.905) 20(-1.27,2.905) 21(1.27,-2.905) 22(1.27,2.905) 23(3.81,-2.905) 24(3.81,2.905) 25(6.35,-2.905) 26(6.35,2.905) 27(8.89,-2.905) 28(8.89,2.905) 29(11.43,-2.905) 30(11.43,2.905) 31(13.97,-2.905) 32(13.97,2.905) 33(16.51,-2.905) 34(16.51,2.905) 35(19.05,-2.905) 36(19.05,2.905) 37(21.59,-2.905) 38(21.59,2.905) 39(24.13,-2.905) 40(24.13,2.905)
  round 1.02 hole 1.02 unplated: ""(-24.13,-1.27) ""(-24.13,1.27) ""(-21.59,-1.27) ""(-21.59,1.27) ""(-19.05,-1.27) ""(-19.05,1.27) ""(-16.51,-1.27) ""(-16.51,1.27) ""(-13.97,-1.27) ""(-13.97,1.27) ""(-11.43,-1.27) ""(-11.43,1.27) ""(-8.89,-1.27) ""(-8.89,1.27) ""(-6.35,-1.27) ""(-6.35,1.27) ""(-3.81,-1.27) ""(-3.81,1.27) ""(-1.27,-1.27) ""(-1.27,1.27) ""(1.27,-1.27) ""(1.27,1.27) ""(3.81,-1.27) ""(3.81,1.27) ""(6.35,-1.27) ""(6.35,1.27) ""(8.89,-1.27) ""(8.89,1.27) ""(11.43,-1.27) ""(11.43,1.27) ""(13.97,-1.27) ""(13.97,1.27) ""(16.51,-1.27) ""(16.51,1.27) ""(19.05,-1.27) ""(19.05,1.27) ""(21.59,-1.27) ""(21.59,1.27) ""(24.13,-1.27) ""(24.13,1.27)
  silkscreen extent -25.65,-4.5 25.65,2.5
SW_219-4MST [mm]
  rect 2.44x1.13 smd paste+0 mask+0.102: 1(-4.3,3.81) 2(-4.3,1.27) 3(-4.3,-1.27) 4(-4.3,-3.81) 5(4.3,-3.81) 6(4.3,-1.27) 7(4.3,1.27) 8(4.3,3.81)
  silkscreen extent -6.35,-5.81 3.35,5.81, body extent -4.95,-5.81 4.95,5.81, height 4.58
TP_1mm_UN1Q [mm] "Test Point, Circular, 1.0 mm"
  round 1 smd paste-1 mask+0.06: 1(0,0)
  silkscreen extent -0.5,-0.5 0.5,0.5, body extent -0.5,-0.5 0.5,0.5, height 0.02
TP_1x2mm_UN1Q [mm] "Test Point 1 mm x 2 mm"
  rect 1x2 smd paste-5 mask+0.1: 1(0,0)
  silkscreen extent -0.6,-1.1 0.6,1.1, body extent -0.5,-1 0.5,1, height 0.03
TVS_0201_EZAEG [mm] "TVS 0201 0.04pF Panasonic EZAEG1A"
  rect 0.25x0.3 smd mask+0.05: 1(-0.275,0) 2(0.275,0)
  silkscreen extent -0.33,-0.18 0.33,0.18, body extent -0.33,-0.18 0.33,0.18, height 0.26
uHDMI-SMD-Molex [mm] "Micro-HDMI connector, surface mount"
  rect 0.2x0.85 smd paste+0 mask+0.05: 1(1.8,2.388) 3(1.4,2.388) 5(1,2.388) 7(0.6,2.388) 9(0.2,2.388) 11(-0.2,2.388) 13(-0.6,2.388) 15(-1,2.388) 17(-1.4,2.388) 19(-1.8,2.388)
  rect 0.2x1 smd paste+0 mask+0.05: 2(1.6,1.163) 4(1.2,1.163) 6(0.8,1.163) 8(0.4,1.163) 10(0,1.163) 12(-0.4,1.163) 14(-0.8,1.163) 16(-1.2,1.163) 18(-1.6,1.163)
  rect 1.8x1.4 smd paste-0.1 mask+0.05: 20(2.8,0.963) 21(-2.8,0.963)
  rect 1.8x2 smd paste-0.1 mask+0.05: 22(-2.8,-2.387) 23(2.8,-2.387)
  Keep-Out Layer region: -2,-3.8 -2,-3.5 -1.8,-3.5 -1.8,-1.3 -2,-1.3 -2,0.1 2,0.1 2,-1.3 1.8,-1.3 1.8,-3.5 2,-3.5 2,-3.8
  silkscreen extent -3.7,-4.8 3.7,2.81, body extent -3.25,-4.8 3.25,2.7, height 2.97
UQFN24_RKT0024A_TI [mm] "UQFN24"
  rrect25% 0.75x0.2 smd paste+0 mask+0.05: 1(-0.825,1.8) 2(-0.825,1.4) 3(-0.825,1) 4(-0.825,0.6) 5(-0.825,0.2) 6(-0.825,-0.2) 7(-0.825,-0.6) 8(-0.825,-1) 9(-0.825,-1.4) 10(-0.825,-1.8) 13(0.825,-1.8) 14(0.825,-1.4) 15(0.825,-1) 16(0.825,-0.6) 17(0.825,-0.2) 18(0.825,0.2) 19(0.825,0.6) 20(0.825,1) 21(0.825,1.4) 22(0.825,1.8)
  rrect25% 0.3x0.75 smd paste-0.06 mask-0.05: 11(-0.2,-1.825) 12(0.2,-1.825) 23(0.2,1.825) 24(-0.2,1.825)
  silkscreen extent -1.05,-2.05 1.05,2.05, body extent -1,-2 1,2, height 0.55
USB251xB_QFN36P50_600X600X100 [mm] "SQFN36"
  oval 1.1x0.3 smd paste+0 mask+0.05: 1(-2.85,2) 2(-2.85,1.5) 3(-2.85,1) 4(-2.85,0.5) 5(-2.85,0) 6(-2.85,-0.5) 7(-2.85,-1) 8(-2.85,-1.5) 9(-2.85,-2) 19(2.85,-2) 20(2.85,-1.5) 21(2.85,-1) 22(2.85,-0.5) 23(2.85,0) 24(2.85,0.5) 25(2.85,1) 26(2.85,1.5) 27(2.85,2)
  oval 0.3x1.1 smd paste+0 mask+0.05: 10(-2,-2.85) 11(-1.5,-2.85) 12(-1,-2.85) 13(-0.5,-2.85) 14(0,-2.85) 15(0.5,-2.85) 16(1,-2.85) 17(1.5,-2.85) 18(2,-2.85) 28(2,2.85) 29(1.5,2.85) 30(1,2.85) 31(0.5,2.85) 32(0,2.85) 33(-0.5,2.85) 34(-1,2.85) 35(-1.5,2.85) 36(-2,2.85)
  rect 3.8x3.8 smd paste-0.5 mask+0.05: 37(0,0)
  silkscreen extent -3.05,-3.05 3.05,3.05, body extent -3.05,-3.05 3.05,3.05, height 1.01
USB_C_AMPHENOL_124018612112A [mm] "USB3.2 GEN1, Type C, Top mount, CH 1.50mm, Dual Row SMT, IPX8"
  rect 0.25x0.75 smd paste+0 mask+0.05: A1(-3.05,1.687) A2(-2.25,1.687) A3(-1.75,1.687) A4(-1.25,1.687) A5(-0.75,1.687) A6(-0.25,1.687) A7(0.25,1.687) A8(0.75,1.687) A9(1.25,1.687) A10(1.75,1.687) A11(2.25,1.687) A12(3.05,1.687) B1(3,0.437) B2(2.5,0.437) B3(2,0.437) B4(1.5,0.437) B5(1,0.437) B6(0.5,0.437) B7(-0.5,0.437) B8(-1,0.437) B9(-1.5,0.437) B10(-2,0.437) B11(-2.5,0.437) B12(-3,0.437)
  rect 0.3x0.75 smd paste+0 mask+0.05: SH1(-3.55,1.687) SH2(3.55,1.687)
  oval 1.025x2.05 hole 0.45 slot 1.65 at 90 deg paste-2539.97 mask+0.125: SH3(-4.45,-1.687)
  oval 1.025x2.05 hole 0.45 slot 1.65 at 90 deg mask+0.125: SH4(4.45,-1.687)
  oval 0.9x1.8 hole 0.45 slot 1.45 at 90 deg mask+0.125: SH5(-4.45,1.512) SH6(4.45,1.512)
  silkscreen extent -4.92,-5.89 4.93,2.76, body extent -4.92,-5.89 4.93,2.76, height 3.53
USON10_DQA_TI [mm] "USON10"
  rect 0.2x0.6 smd paste+0 mask+0.05: 1(-1,-0.417) 2(-0.5,-0.417) 4(0.5,-0.417) 5(1,-0.417) 6(1,0.417) 7(0.5,0.417) 9(-0.5,0.417) 10(-1,0.417)
  rect 0.4x0.6 smd paste+0 mask+0.05: 3(0,-0.417) 8(0,0.417)
  silkscreen extent -1.25,-0.77 1.25,0.5, body extent -1.25,-0.5 1.25,0.5, height 0.55
VFBGA24P50_300X300X100_NXP [mm]
  round 0.3 smd paste-2539.97 mask-2539.97: A1(-1,1) A2(-0.5,1) A3(0,1) A4(0.5,1) A5(1,1) B1(-1,0.5) B3(0,0.5) B4(0.5,0.5) B5(1,0.5) C1(-1,0) C2(-0.5,0) C3(0,0) C4(0.5,0) C5(1,0) D1(-1,-0.5) D2(-0.5,-0.5) D3(0,-0.5) D4(0.5,-0.5) D5(1,-0.5) E1(-1,-1) E2(-0.5,-1) E3(0,-1) E4(0.5,-1) E5(1,-1)
  silkscreen extent -1.5,-1.5 1.5,1.5, body extent -1.5,-1.5 1.5,1.5, height 1
VFQFPN-24_9FGV0241AKLF [mm] "VFQFPN-24"
  rect 0.55x0.25 smd paste+0 mask+0.05: 1(-1.875,1.25) 2(-1.875,0.75) 3(-1.875,0.25) 4(-1.875,-0.25) 5(-1.875,-0.75) 6(-1.875,-1.25) 13(1.875,-1.25) 14(1.875,-0.75) 15(1.875,-0.25) 16(1.875,0.25) 17(1.875,0.75) 18(1.875,1.25)
  rect 0.25x0.55 smd paste+0 mask+0.05: 7(-1.25,-1.875) 8(-0.75,-1.875) 9(-0.25,-1.875) 10(0.25,-1.875) 11(0.75,-1.875) 12(1.25,-1.875) 19(1.25,1.875) 20(0.75,1.875) 21(0.25,1.875) 22(-0.25,1.875) 23(-0.75,1.875) 24(-1.25,1.875)
  rect 2.45x2.45 smd paste-0.129 mask+0.07: 25(0,0)
  silkscreen extent -2.05,-2.05 2.05,2.05, body extent -2.05,-2.05 2.05,2.05, height 1
X2SON_DPW0005B [mm] "X2SON_DPW0005B, 0.8 × 0.8 × 0.4mm"
  round 0.025 smd paste-0.05 mask-0.05: 1(-0.39,0.24) 2(-0.39,-0.24) 4(0.39,-0.24) 5(0.39,0.24)
  rrect50% 0.35x0.35 smd rot 45 paste-0.06 mask-0.05: 3(0,0)
  Top Layer region: 0.55,-0.4 0.11,-0.4 0.11,-0.285 0.315,-0.08 0.555,-0.08 0.582,-0.085 0.604,-0.101 0.62,-0.123 0.625,-0.15 0.625,-0.15 0.625,-0.325 0.619,-0.354 0.603,-0.378 0.579,-0.394 0.55,-0.4
  Top Layer region: -0.55,0.4 -0.109,0.4 -0.109,0.286 -0.315,0.08 -0.555,0.08 -0.581,0.085 -0.604,0.1 -0.619,0.123 -0.625,0.15 -0.625,0.15 -0.625,0.325 -0.619,0.354 -0.603,0.378 -0.578,0.394 -0.55,0.4
  Top Layer region: -0.55,-0.4 -0.11,-0.4 -0.11,-0.285 -0.315,-0.08 -0.555,-0.08 -0.582,-0.085 -0.605,-0.1 -0.62,-0.123 -0.625,-0.15 -0.625,-0.15 -0.625,-0.325 -0.619,-0.354 -0.603,-0.378 -0.579,-0.394 -0.55,-0.4
  Top Layer region: 0.55,0.4 0.109,0.4 0.109,0.286 0.315,0.08 0.555,0.08 0.581,0.085 0.604,0.1 0.619,0.123 0.625,0.15 0.625,0.15 0.625,0.325 0.619,0.354 0.603,0.378 0.578,0.394 0.55,0.4
  silkscreen extent -0.45,-0.45 0.45,0.45, body extent -0.4,-0.4 0.4,0.4, height 0.4
XSON6_SOT1202_Nexperia [mm]
  rect 0.15x0.35 smd paste+0 mask+0.05: 1(-0.35,-0.25)
  rect 0.15x0.3 smd paste+0 mask+0.05: 2(0,-0.275) 3(0.35,-0.275) 4(0.35,0.275) 5(0,0.275) 6(-0.35,0.275)
  silkscreen extent -0.55,-0.55 0.55,0.55, body extent -0.5,-0.5 0.5,0.5, height 0.33
XTAL_2016_UN1Q [mm] "Murata XTAL 2.0 x 1.6mm"
  rect 0.9x0.8 smd paste+0 mask+0.05: 1(-0.7,-0.55) 2(0.7,-0.55) 3(0.7,0.55) 4(-0.7,0.55)
  silkscreen extent -1.07,-0.87 1.07,0.87, body extent -1.05,-0.85 1.05,0.85, height 0.81
XTAL_3225_EPSON [mm] "Epson TSX-3225 3.2mm x 2.5mm"
  rect 1x1.2 smd paste-0.1 mask+0.05: 1(-0.75,1) 2(-0.75,-1) 3(0.75,-1) 4(0.75,1)
  silkscreen extent -1.33,-1.68 1.33,1.68, body extent -1.25,-1.6 1.25,1.6, height 0.6

## Part data
1? 1? ? ? ? ? ? ? ? ? ? ? ? ? ? ?: library part CMP-001-000774-6, "ESD Protection Panasonic EZAEG1N50AC", Manufacturer=Panasonic, Manufacturer Part Number=EZAEG1N50AC, Operating temperature range="-55C ... +125C", Package=0201, Voltage=30V, ClassName=SMALL, Component Type="ESD & EMI", ComponentLink1Description=1_Datasheet, ComponentLink1URL=https://industrial.panasonic.com/ww/products/pt/esd-suppressor/models/EZAEG1N50AC, ComponentLink2Description="2_Product page", ComponentLink3Description=3_X-information, ComponentLink4Description=4_X-information, Creation date=17102023, Dimensions WxLxH="0.33 mm x 0.63mm x 0.26mm", HasBeenBuilt=False, Part Number=EZAEG1N50AC, Sort order=402, Source=Discrete_UN1Q.SchLib, System=Discrete
C1 C2 C3 C7 C8 C9 C10 C13 C14 C15 C16 C17 C19 C20 C21 C23 C24 C25 C27 C28 C29 C30 C32 C33 C34 C35 C36 C37 C38 C40 C41 C42 C43 C44 C45 C46 C48 C49 C50 C52 C53 C54 C55 C68 C72 C115 C? C? C? C? C? C? C? C? C? C? C? C? C? C? C? C? C? C? C? C? C? C? C? C? C? C? C? C? C? C? C? C? C? C? C? C? C? C? C? C? C? C? C? C? C? C? C? C? C? C? C? C? C? C? C? C? C? C? C? C? C? C? C? C? C? C? C? C? C? C? C? C? C? C? C? C? C? C? C? C? C? C? C? C? C? C? C? C? C? C?: library part CMP-001-000336-15, "CAP", Manufacturer=Kyocera, Manufacturer Part Number=KGM03CS61A105MH, Operating temperature range="-55C to +105C", Package=0201, Temperature characteristics=X6S, Tolerance=+/-20%, Voltage=10V, Alternative component=Allowed, ClassName=SMALL, Component Type=Capacitor, ComponentLink1Description=1_Datasheet, ComponentLink2Description="2_Product page", ComponentLink3Description=3_X-information, ComponentLink4Description=4_X-information, Creation date=20190101, HasBeenBuilt=False, Part Number=KGM03CS61A105MH, Sort order=302, Source=RLC_UN1Q.SchLib, System=RLC
C4 C6 C12 C18 C22 C26 C31 C39 C47 C51 C60 C66 C74 C? C? C? C? C? C? C? C? C? C? C? C? C? C? C? C? C? C? C? C? C? C? C? C? C? C? C? C? C? C? C? C? C? C? C? C?: library part CMP-001-000883-14, "CAP", Manufacturer="Cal-Chip Electronics, Inc.", Manufacturer Part Number=GMC04X6S106M6R3NT, Package=0402, Temperature characteristics=X6S, Tolerance=+/-20%, Voltage=6.3V, Alternative component=Allowed, Component Type=Capacitor, ComponentLink1Description=1_Datasheet, ComponentLink2Description="2_Product page", ComponentLink3Description=3_X-information, ComponentLink4Description=4_X-information, Creation date=26042024, HasBeenBuilt=TBD, Part Number=GMC04X6S106M6R3NT, Sort order=304, System=RLC
C5 C11 C58 C59 C61 C62 C63 C64 C65 C? C? C? C? C? C? C? C? C? C? C? C? C? C? C? C? C? C? C? C? C? C?: library part CMP-001-000889-11, "CAP", Manufacturer=Murata, Manufacturer Part Number=GRM033C81A224KE01D, Package=0201, Temperature characteristics=X6S, Tolerance=+/-20%, Voltage=10V, Alternative component=Allowed, ClassName=SMALL, Component Type=Capacitor, ComponentLink1Description=1_Datasheet, ComponentLink2Description="2_Product page", ComponentLink3Description=3_X-information, ComponentLink4Description=4_X-information, Creation date=26042024, Dimensions WxLxH=0.35, HasBeenBuilt=TBD, Part Number=GRM033C81A224KE01D, Sort order=302, System=RLC
C56 C57 C78 C84 C95 C? C? C? C?: library part CMP-001-000888-12, "CAP", Manufacturer=Murata, Manufacturer Part Number=GRT155C81A475ME13J, Package=0402, Temperature characteristics=X6S, Tolerance=+/-10%, Voltage=10V, Alternative component=Allowed, Component Type=Capacitor, ComponentLink1Description=1_Datasheet, ComponentLink2Description="2_Product page", ComponentLink3Description=3_X-information, ComponentLink4Description=4_X-information, Creation date=26042024, HasBeenBuilt=TBD, Part Number=GRT155C81A475ME13J, Sort order=304, System=RLC
C67 C69 C73 C76 C79 C80 C83 C86: library part CMP-001-001253-9, "CAP", Manufacturer=Murata, Manufacturer Part Number=GRM188Z71A106KA73D, Package=0603, Temperature characteristics=X7R, Tolerance=+/-10%, Voltage=10V, Alternative component=Allowed, Component Type=Capacitor, ComponentLink1Description=1_Datasheet, ComponentLink2Description="2_Product page", ComponentLink3Description=3_X-information, ComponentLink4Description=4_X-information, Creation date=20240404, Part Number=GRM188Z71A106KA73D, Sort order=306, System=RLC
C70 C75 C81 C85 C89 C92: library part CMP-001-000259-10, "Not Assembled - CAP", Package=0603, Component Type=Capacitor, ComponentLink1Description=1_Datasheet, ComponentLink2Description="2_Product page", ComponentLink3Description=3_X-information, ComponentLink4Description=4_X-information, Creation date=20190101, HasBeenBuilt=TBD, Sort order=999, Source=RLC_UN1Q.SchLib, System=RLC
C71 C77 C82 C88 C90 C93 C? C?: library part CMP-001-000890-13, "CAP", Manufacturer=Murata, Manufacturer Part Number=GRM188C80J226ME15D, Package=0603, Temperature characteristics=X6S, Tolerance=+/-20%, Voltage=6.3V, Alternative component=Allowed, Component Type=Capacitor, ComponentLink1Description=1_Datasheet, ComponentLink2Description="2_Product page", ComponentLink3Description=3_X-information, ComponentLink4Description=4_X-information, Creation date=26042024, HasBeenBuilt=TBD, Part Number=GRM188C80J226ME15D, Sort order=306, System=RLC
C87 C91 C94: library part CMP-001-001247-9, "CAP", Manufacturer=Murata, Manufacturer Part Number=GRM155Z71A105KE01J, Package=0402, Temperature characteristics=X7R, Tolerance=+/-10%, Voltage=10V, Alternative component=Allowed, Component Type=Capacitor, ComponentLink1Description=1_Datasheet, ComponentLink2Description="2_Product page", ComponentLink3Description=3_X-information, ComponentLink4Description=4_X-information, Creation date=20240404, Part Number=GRM155Z71A105KE01J, Sort order=304, System=RLC
C96 C97 C? C? C? C? C? C? C? C? C? C? C? C?: library part CMP-001-000420-11, "CAP_RF_MATCHING", Manufacturer=Murata, Manufacturer Part Number=GRM0335C1H120GA01, Operating temperature range="-55 ... +125C", Package=0201, Temperature characteristics=C0G, Tolerance="+/- 2%", Voltage=50V, ClassName=SMALL, Component Type=Capacitor, ComponentLink1Description=1_Datasheet, ComponentLink2Description="2_Product page", ComponentLink3Description=3_X-information, ComponentLink4Description=4_X-information, Creation date=20211123, HasBeenBuilt=TBD, Part Number=GRM0335C1H120GA01, Remark="RF matching, use part number", Sort order=202, Source=RLC_UN1Q.SchLib, System=RLC
C98 C113 C? C? C? C? C? C? C? C?: library part CMP-001-000368-12, "CAP", Manufacturer=Samsung, Manufacturer Part Number=CL31B106KBHNNNE, Operating temperature range="-55 ... +125°C", Package=1206, Temperature characteristics=X7R, Tolerance=+/-10%, Voltage=50V, Alternative component=Allowed, Component Type=Capacitor, ComponentLink1Description=1_Datasheet, ComponentLink2Description="2_Product page", ComponentLink3Description=3_X-information, ComponentLink4Description=4_X-information, Creation date=20220729, ECCN=EAR99, HasBeenBuilt=Saluki3, Part Number=CL31B106KBHNNNE, RoHS=ROHS3, Sort order=308, Source=RLC_UN1Q.SchLib, System=RLC
C99 C104 C105 C108 C112 C114 C116 C121 C122 C123 C? C? C? C? C? C? C? C? C? C? C? C? C? C? C? C? C? C? C? C? C? C? C? C? C? C? C? C? C? C? C? C? C? C? C? C? C? C?: library part CMP-001-000371-14, "CAP", Manufacturer=Murata, Manufacturer Part Number=GRM155R71H104KE14D, Package=0402, Temperature characteristics=X7R, Tolerance=+/-10%, Voltage=50V, Alternative component=Allowed, Component Type=Capacitor, ComponentLink1Description=1_Datasheet, ComponentLink2Description="2_Product page", ComponentLink3Description=3_X-information, ComponentLink4Description=4_X-information, Creation date=20190101, HasBeenBuilt=TBD, Part Number=GRM155R71H104KE14D, Sort order=304, System=RLC
C100 C101 C102 C103 C117 C118 C119 C120 C? C? C? C? C? C? C? C? C? C? C? C? C? C? C? C? C? C? C? C? C? C? C? C? C? C? C? C? C? C? C? C? C? C? C? C? C? C? C? C?: library part CMP-001-000892-11, "CAP", Manufacturer=Murata, Manufacturer Part Number=GRM21BZ71A226ME15L, Package=0805, Temperature characteristics=X7R, Tolerance=+/-20%, Voltage=10V, Alternative component=Allowed, Component Type=Capacitor, ComponentLink1Description=1_Datasheet, ComponentLink2Description="2_Product page", ComponentLink3Description=3_X-information, ComponentLink4Description=4_X-information, Creation date=22032024, HasBeenBuilt=TBD, Part Number=GRM21BZ71A226ME15L, Sort order=308, System=RLC
C106 C107 C110 C111 C? C? C? C? C? C? C? C? C? C? C? C? C? C? C? C?: library part CMP-001-000383-12, "CAP", Manufacturer=TDK, Manufacturer Part Number=C2012X7R1H225K125AC, Operating temperature range="-55 ... +125°C", Package=0805, Temperature characteristics=X7R, Tolerance=+/-10%, Voltage=50V, Alternative component=Allowed, Component Type=Capacitor, ComponentLink1Description=1_Datasheet, ComponentLink2Description="2_Product page", ComponentLink3Description=3_X-information, ComponentLink4Description=4_X-information, Creation date=20220803, ECCN=EAR99, HasBeenBuilt=Saluki3, Part Number=C2012X7R1H225K125AC, RoHS=ROHS3, Sort order=308, Source=RLC_UN1Q.SchLib, System=RLC
C109 C? C? C? C?: library part CMP-001-000321-12, "CAP", Manufacturer=Murata, Manufacturer Part Number=GCM155R71H223KA55D, Operating temperature range="-55 ... +125°C", Package=0402, Temperature characteristics=X7R, Tolerance=+/-10%, Voltage=50V, Alternative component=Allowed, Component Type=Capacitor, ComponentLink1Description=1_Datasheet, ComponentLink2Description="2_Product page", ComponentLink3Description=3_X-information, ComponentLink4Description=4_X-information, Creation date=20210916, ECCN=EAR99, HasBeenBuilt=False, Part Number=GCM155R71H223KA55D, RoHS=RoHS3, Sort order=304, Source=RLC_UN1Q.SchLib, System=RLC
C? C?: library part CMP-001-001071-3, "CAP", Manufacturer=Murata, Manufacturer Part Number=GRM32EC81C476KE15K, Operating temperature range="-55 ... +105 °C", Package=1210, Temperature characteristics=X6S, Tolerance=±10%, Voltage=16V, Alternative component=Allowed, Component Type=Capacitor, ComponentLink1Description=2_Product_page, ComponentLink2Description="2_Product page", ComponentLink3Description=3_X-information, ComponentLink4Description=4_X-information, Creation date=20250214, Dimensions WxLxH="2.5 x 3.2 x 2.5", ECCN=EAR99, HasBeenBuilt=no, Part Number=GRM32EC81C476KE15K, RoHS=RoHS3, Sort order=304, System=RLC
C? C? C? C? C? C? C? C? C? C? C? C? C? C? C? C? C? C? C? C? C? C? C? C? C? C? C? C? C? C? C? C? C? C? C? C? C? C? C? C? C? C? C? C? C? C? C? C? C? C? C? C? C? C? C? C? C? C? C? C? C? C? C? C? C? C? C? C? C? C? C? C? C? C? C? C? C? C? C? C? C? C? C? C? C? C? C? C? C? C? C? C? C? C? C? C? C? C? C? C? C? C? C? C? C? C? C? C? C? C? C? C? C? C? C? C? C? C?: library part CMP-001-000385-16, "CAP", Manufacturer=Murata, Manufacturer Part Number=GRM033C71C104KE14D, Package=0201, Temperature characteristics=X7S, Tolerance=+/-10%, Voltage=16V, Alternative component=Allowed, ClassName=SMALL, Component Type=Capacitor, ComponentLink1Description=1_Datasheet, ComponentLink2Description="2_Product page", ComponentLink3Description=3_X-information, ComponentLink4Description=4_X-information, Creation date=20190101, HasBeenBuilt=TBD, Part Number=GRM033C71C104KE14D, Sort order=302, Source=RLC_UN1Q.SchLib, System=RLC
C? C?: library part CMP-001-000400-12, "CAP_RF_MATCHING", Manufacturer=Murata, Manufacturer Part Number=GJM0335C1E180JB01, Package=0201, Temperature characteristics=C0G, Tolerance=+/-2%, Voltage=25V, ClassName=SMALL, Component Type=Capacitor, ComponentLink1Description=1_Datasheet, ComponentLink2Description="2_Product page", ComponentLink3Description=3_X-information, ComponentLink4Description=4_X-information, Creation date=20200101, HasBeenBuilt=TBD, Part Number=GJM0335C1E180JB01, Remark="RF matching, use part number", Sort order=202, Source=RLC_UN1Q.SchLib, System=RLC
C? C? C? C? C? C? C? C? C? C? C? C?: library part CMP-001-000269-15, "CAP", Manufacturer=Murata, Manufacturer Part Number=GRM0335C1H150JA01D, Package=0201, Temperature characteristics=C0G, Tolerance=+/-5%, Voltage=50V, Alternative component=Allowed, ClassName=SMALL, Component Type=Capacitor, ComponentLink1Description=1_Datasheet, ComponentLink2Description="2_Product page", ComponentLink3Description=3_X-information, ComponentLink4Description=4_X-information, Creation date=20190101, HasBeenBuilt=TBD, Part Number=GRM0335C1H150JA01D, Sort order=302, Source=RLC_UN1Q.SchLib, System=RLC
C? C?: library part CMP-001-000335-15, "CAP", Manufacturer=Murata, Manufacturer Part Number=GRM033R71C103KE14D, Package=0201, Temperature characteristics=X7R, Tolerance=+/-10%, Voltage=16V, Alternative component=Allowed, ClassName=SMALL, Component Type=Capacitor, ComponentLink1Description=1_Datasheet, ComponentLink2Description="2_Product page", ComponentLink3Description=3_X-information, ComponentLink4Description=4_X-information, Creation date=20190101, HasBeenBuilt=TBD, Part Number=GRM033R71C103KE14D, Sort order=302, Source=RLC_UN1Q.SchLib, System=RLC
C? C? C? C?: library part CMP-001-000281-14, "CAP", Manufacturer=Murata, Manufacturer Part Number=GRM033R71E222KA12J, Package=0201, Temperature characteristics=X7R, Tolerance=+/-10%, Voltage=25V, Alternative component=Allowed, ClassName=SMALL, Component Type=Capacitor, ComponentLink1Description=1_Datasheet, ComponentLink2Description="2_Product page", ComponentLink3Description=3_X-information, ComponentLink4Description=4_X-information, Creation date=20222504, HasBeenBuilt=TBD, Part Number=GRM033R71E222KA12J, Sort order=302, Source=RLC_UN1Q.SchLib, System=RLC
C? C? C? C? C? C?: library part CMP-001-000887-10, "CAP", Manufacturer=Murata, Manufacturer Part Number=GRM155C81A225KE44D, Package=0402, Temperature characteristics=X6S, Tolerance=+/-10%, Voltage=10V, Alternative component=Allowed, Component Type=Capacitor, ComponentLink1Description=1_Datasheet, ComponentLink2Description="2_Product page", ComponentLink3Description=3_X-information, ComponentLink4Description=4_X-information, Creation date=20190101, Part Number=GRM155C81A225KE44D, Sort order=304, System=RLC
C? C? C? C?: library part CMP-001-000280-15, "CAP", Manufacturer=TDK, Manufacturer Part Number=GRM0335C1H270JA01D, Package=0201, Temperature characteristics=C0G, Tolerance=+/-5%, Voltage=50V, Alternative component=Allowed, ClassName=SMALL, Component Type=Capacitor, ComponentLink1Description=1_Datasheet, ComponentLink2Description="2_Product page", ComponentLink3Description=3_X-information, ComponentLink4Description=4_X-information, Creation date=20190101, HasBeenBuilt=TBD, Part Number=GRM0335C1H270JA01D, Sort order=302, Source=RLC_UN1Q.SchLib, System=RLC